# EAGLE board LC Meter (EAGLE 9.6.2)
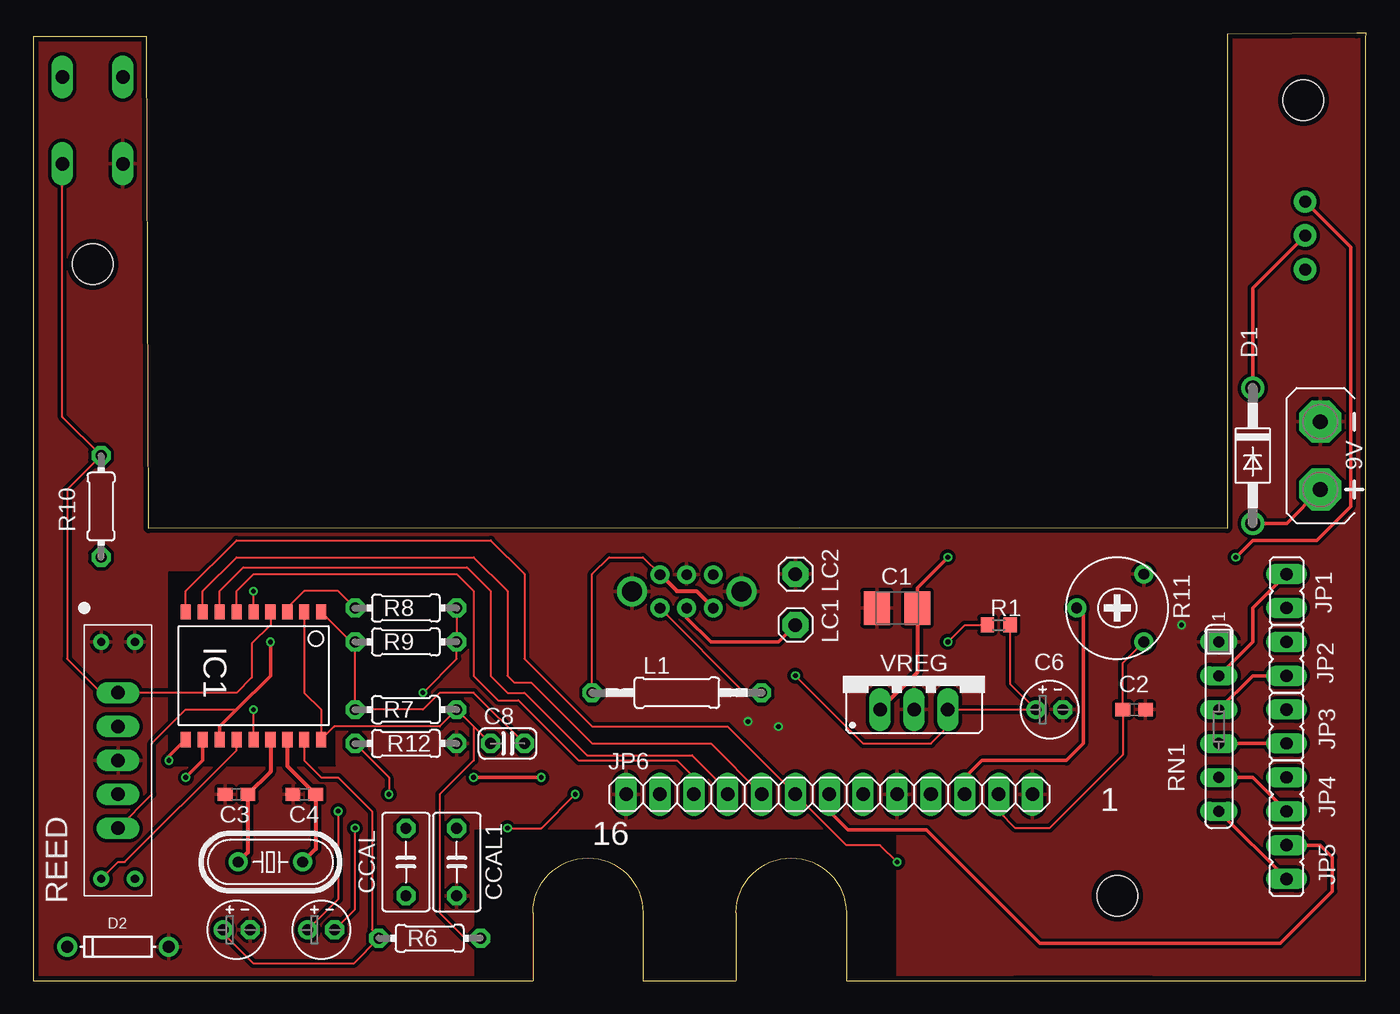
[diagram p0: board, top side]
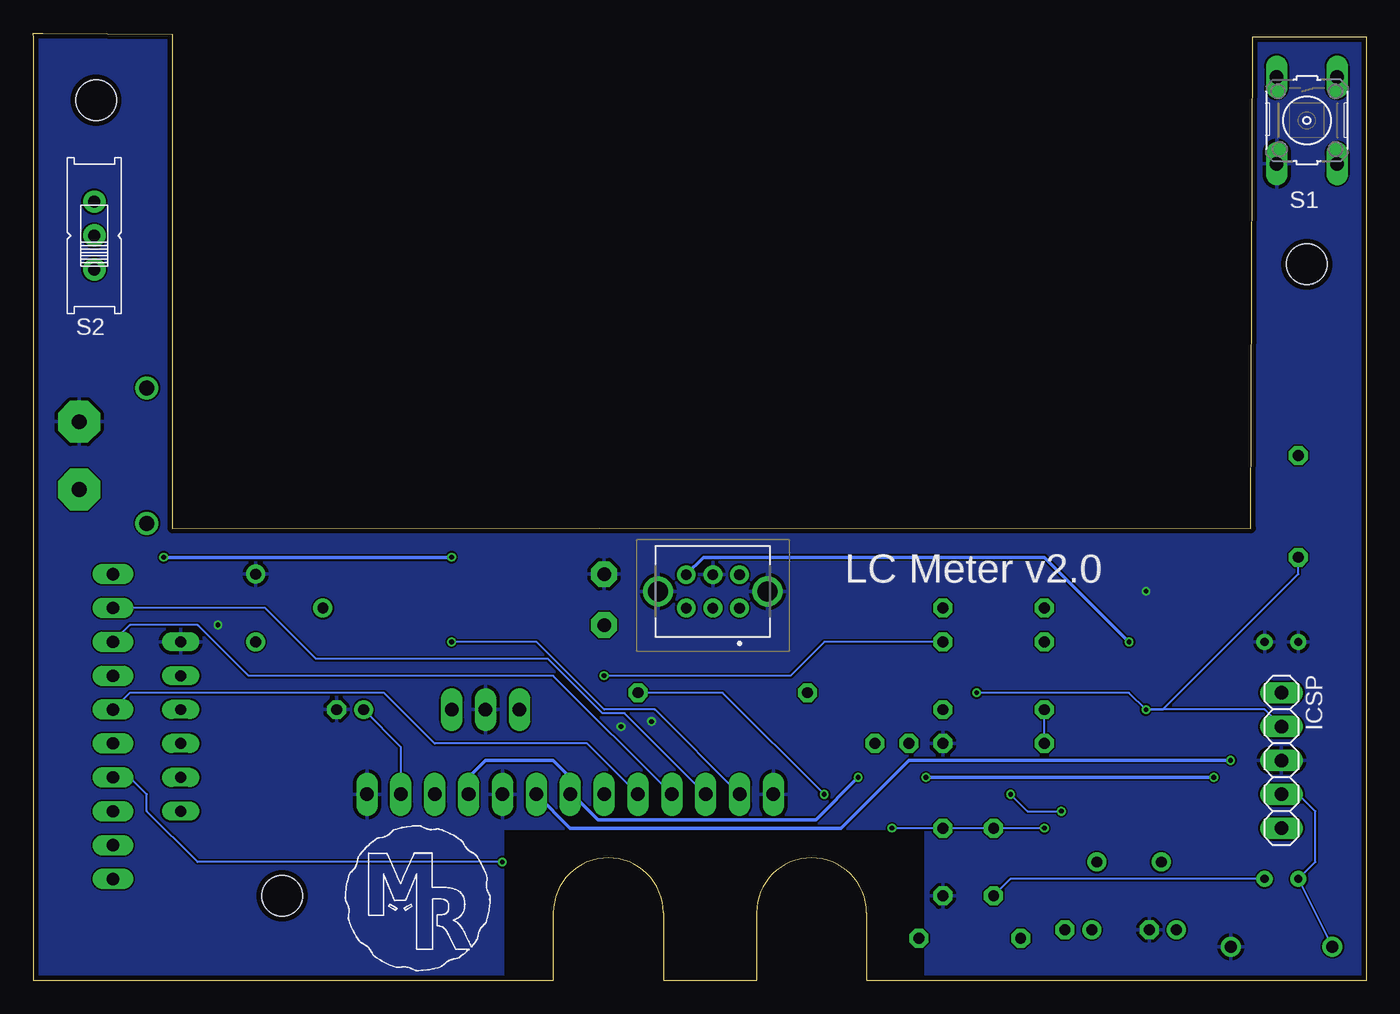
[diagram p1: board, bottom side, seen from below]

Size 99.95 x 71.04 mm. Coordinates in mm from the lower left corner, seen from the top.
Outline: 73.66,0 60.96,0 60.96,5.08 arc180 52.7,5.08 52.7,0 45.72,0 45.72,5.08 arc180 37.46,5.08 37.46,0 0,0 0,70.79 8.51,70.79 8.64,33.91 57.48,33.96 89.54,33.91 89.54,70.99 99.24,71.04 99.95,71.04 99.95,70.99 99.93,70.79 99.93,0 83.82,0
Outline: 73.66,0 74.3,0
Outline: 82.55,0 83.82,0
Outline: 73.66,0 83.82,0
Copper layers (1*16): Top 0.035mm / dielectric 1.5mm / Bottom 0.035mm
Design rules "JLPCB": minimum track width 5mil, minimum drill 0.2mm, track to track 5mil, track to pad 6mil, pad to pad 5mil, via to via 10mil, smd to smd 5mil, copper to edge 15mil, drill to drill 13mil, minimum pad ring 12mil, minimum via ring 6mil, stop-mask expansion 4mil, vias tented up to drill 0mil, thermal gap 10mil
Holes 3.05 mm at 4.45,53.72 95.25,66.04 81.28,6.35

## Footprints (pad centres in the part's own frame; a part is rotated, then mirrored left to right if it is on the bottom)
B/3528-21R = smd 1.95 x 2.5: + 1.525,0; - -1.525,0
C0603 = smd 1.1 x 1: 1 -0.85,0; 2 0.85,0
E2-4 = drill 0.813 pad 1.27: + -1.016,0 | drill 0.813 pad 1.27 octagon: - 1.016,0
C025-024X044 = drill 0.813 octagon: 1 -1.27,0; 2 1.27,0
C050-035X075 = drill 0.813 octagon: 1 -2.54,0; 2 2.54,0
DO41-10 = drill 1.118: A 5.08,0; C -5.08,0
DO-1N4148 = drill 0.9: A -3.81,0; C 3.81,0
AB9V = drill 1.118 pad 3.15 octagon: + 0,2.54; - 0,-2.54
SO-18W = smd 0.762 x 1.143: 1 -5.08,-4.788; 2 -3.81,-4.788; 3 -2.54,-4.788; 4 -1.27,-4.788; 5 0,-4.788; 6 1.27,-4.788; 7 2.54,-4.788; 8 3.81,-4.788; 9 5.08,-4.788; 10 5.08,4.788; 11 3.81,4.788; 12 2.54,4.788; 13 1.27,4.788; 14 0,4.788; 15 -1.27,4.788; 16 -2.54,4.788; 17 -3.81,4.788; 18 -5.08,4.788
1X05 = drill 1.016 long: 1 -5.08,0; 2 -2.54,0; 3 0,0; 4 2.54,0; 5 5.08,0
JP1 = drill 0.914 long: 1 0,-1.27; 2 0,1.27
1X13 = drill 1.016 long: 1 -15.24,0; 2 -12.7,0; 3 -10.16,0; 4 -7.62,0; 5 -5.08,0; 6 -2.54,0; 7 0,0; 8 2.54,0; 9 5.08,0; 10 7.62,0; 11 10.16,0; 12 12.7,0; 13 15.24,0
0207/12 = drill 0.813 octagon: 1 -6.35,0; 2 6.35,0
1X01 = drill 1.016 pad 1.93 octagon: 1 0,0
HC49/S = drill 0.813: 1 -2.413,0; 2 2.413,0
R0603 = smd 1 x 1.1: 1 -0.85,0; 2 0.85,0
0204/7 = drill 0.813 octagon: 1 -3.81,0; 2 3.81,0
RTRIM3339P = drill 0.813: 1 -2.54,2; 2 0,-3.04; 3 2.54,2
COTO2204 = drill 0.6: 1 -8.89,-1.27; 4 8.89,-1.27; 5 8.89,1.27; 8 -8.89,1.27
SIL6 = drill 0.813 long: 1 -6.35,0; 2 -3.81,0; 3 -1.27,0; 4 1.27,0; 5 3.81,0; 6 6.35,0
B3F-10XX = drill 1.016 long: 1 -3.251,2.261; 2 3.251,2.261; 3 -3.251,-2.261; 4 3.251,-2.261
EG1218 = drill 0.9 pad 1.676: O -2.54,0; P 0,0; S 2.54,0
OS202011MS2QS1 = drill 0.8 pad 1.3: 1 0,0; 2 2,0; 3 4,0; 4 0,-2.5; 5 2,-2.5; 6 4,-2.5 | drill 1.5 pad 2.25: MH1 -2.1,-1.25; MH2 6.1,-1.25
78XXS = drill 1.016 long: GND 0,-2.54; IN -2.54,-2.54; OUT 2.54,-2.54

## Placement (x,y rotation side)
C1  22uF  [B/3528-21R]  64.77,27.94 0 top
C2  0.1uF  [C0603]  82.55,20.32 0 top
C3  [C0603]  15.24,13.97 180 top
C4  [C0603]  20.32,13.97 180 top
C5  10uF  [E2-4]  21.59,3.81 0 top
C6  10uF  [E2-4]  76.2,20.32 0 top
C7  10uF  [E2-4]  15.24,3.81 0 top
C8  10pF  [C025-024X044]  35.56,17.78 0 top
CCAL  [C050-035X075]  27.94,8.89 270 top
CCAL1  [C050-035X075]  31.75,8.89 270 top
D1  1N4004  [DO41-10]  91.44,39.37 270 top
D2  [DO-1N4148]  6.35,2.54 180 top
G1  AB9V  [AB9V]  96.52,39.37 180 top
IC1  PIC16F628SO  [SO-18W]  16.51,22.86 180 top
ICSP  [1X05]  6.35,16.51 270 bottom
JP1  [JP1]  93.98,29.21 0 top
JP2  [JP1]  93.98,24.13 180 top
JP3  [JP1]  93.98,19.05 180 top
JP4  [JP1]  93.98,13.97 180 top
JP5  [JP1]  93.98,8.89 180 top
JP6  [1X13]  59.69,13.97 0 top
L1  [0207/12]  48.26,21.59 0 top
LC1  [1X01]  57.15,26.67 0 top
LC2  [1X01]  57.15,30.48 0 top
Q1  [HC49/S]  17.78,8.89 0 top
R1  1k  [R0603]  72.39,26.67 0 top
R6  47k  [0204/7]  29.72,3.17 180 top
R7  100k  [0204/7]  27.94,20.32 180 top
R8  4.7k  [0204/7]  27.94,27.94 180 top
R9  100k  [0204/7]  27.94,25.4 180 top
R10  4.7k  [0204/7]  5.08,35.56 90 top
R11  [RTRIM3339P]  81.28,27.94 270 top
R12  100k  [0204/7]  27.94,17.78 180 top
REED  REEDRELAY  [COTO2204]  6.35,16.51 270 top
RN1  [SIL6]  88.9,19.05 270 top
S1  [B3F-10XX]  4.45,64.52 270 bottom
S2  [EG1218]  95.38,55.88 90 bottom
S3  OS202011MS2QS1  [OS202011MS2QS1]  46.99,27.94 180 bottom
VREG  7805  [78XXS]  66.04,22.86 0 top

## Library data of the parts
C1 D2 LC1 LC2 S2 = adafruit
C2-C8 CCAL CCAL1 = rcl; SPICEPREFIX: C
D1 = diode
G1 = battery
IC1 = microchip; MF: MICROCHIP; MPN: PIC16F628-20I/SO; OC_FARNELL: 9760415; OC_NEWARK: 23C4986
ICSP JP6 = pinhead
JP1-JP5 = jumper
L1 = rcl; SPICEPREFIX: L
Q1 = adafruit; OC_FARNELL: 1667008; OC_NEWARK: unknown
R1 R6-R10 R12 = rcl; SPICEPREFIX: R
R11 = Custom Parts; SPICEMODEL: X; SPICEPREFIXL: POT
REED = Custom Parts
RN1 = resistor-sil; OC_FARNELL: unknown; OC_NEWARK: unknown
S1 = switch-omron; MPN: B3F-1000; OC_FARNELL: 176432; OC_NEWARK: 36M3542
S3 = OS202011MS2QS1; ARROW_PART_NUMBER: OS202011MS2QS1; ARROW_PRICE-STOCK: https://www.arrow.com/en/products/os202011ms2qs1/ck; DESCRIPTION: Switch Slide ON ON DPDT Top Slide 0.1A 12VDC 10000Cycles PC Pins Bracket Mount/Through Hole Bulk; HEIGHT: 8.7mm; MANUFACTURER_NAME: C & K COMPONENTS; MANUFACTURER_PART_NUMBER: OS202011MS2QS1; MOUSER_PART_NUMBER: 611-OS202011MS2QS1; MOUSER_PRICE-STOCK: https://www.mouser.co.uk/ProductDetail/CK/OS202011MS2QS1/?qs=86ySKn7Oc5UsfQ5%2FN%252BBOEA%3D%3D
VREG = v-reg

## Nets
5V: C2.1 C6.+ IC1.14 ICSP.2 JP6.12 R1.2 R8.1 R9.1 R10.1 R11.3 VREG.OUT
CLKIN: C4.1 IC1.16 Q1.2
CLKOUT: C3.1 IC1.15 Q1.1
GND: C1.- C2.2 C3.2 C4.2 C6.- C7.- CCAL1.2 D2.A G1.- IC1.5 ICSP.3 JP6.1 JP6.9 JP6.13 LC2.1 R11.1 R12.1 REED.1 REED.8 RN1.1 S1.4 S3.5 S3.MH1 S3.MH2 VREG.GND
N$1: JP5.2 RN1.6
N$2: CCAL.2 REED.5
N$3: C1.+ S2.S VREG.IN
N$4: D1.C S2.P
N$5: D1.A G1.+
N$7: C5.- CCAL1.1 CCAL.1 L1.2 S3.1
N$8: JP4.2 RN1.5
N$12: JP3.2 RN1.4
N$13: JP2.2 RN1.3
N$14: JP1.2 RN1.2
N$15: LC1.1 S3.2
N$22: L1.1 S3.3 S3.4
N$23: JP6.11 R11.2
N$31: JP6.2 R1.1
RA0: C7.+ IC1.17 R6.2
RA2: C5.+ C8.2 IC1.1 R7.2 R9.2 R12.2
RA3: C8.1 IC1.2 IC1.18 R6.1 R7.1
RA4: IC1.3 R8.2
RB0: IC1.6 JP1.1 JP6.3
RB1: IC1.7 JP2.1 JP6.4
RB2: IC1.8 JP3.1 JP6.5
RB3: IC1.9 JP4.1 JP6.6
RB4: IC1.10 JP6.8
RB5: IC1.11 JP5.1 JP6.7 JP6.10
RB6: IC1.12 ICSP.5 S3.6
RB7: D2.C IC1.13 ICSP.4 REED.4
RST: IC1.4 ICSP.1 R10.2 S1.2

## Tracks (layer width: path | path; a pad name or v marks a point on that pad's centre or on a via)
5V  (via drill 0.35)
  Top 0.152: R8.1 R9.1 31.75,24.13 v29.21,21.59 | IC1.14 v16.51,20.32 | v57.15,22.86 62.23,17.78 67.31,17.78 68.58,19.05 VREG.OUT C6.+ 73.24,22.26 R1.2 | JP6.12 72.39,12.7 73.66,11.43 76.2,11.43 81.7,16.93 C2.1 81.7,23.82 R11.3
  Bottom 0.152: v16.51,20.32 17.78,21.59 v29.21,21.59 | v16.51,20.32 15.24,20.32 5.08,30.48 R10.1 | ICSP.2 7.62,20.32 v16.51,20.32 | R9.1 40.64,25.4 43.18,22.86 v57.15,22.86 | C6.+ 72.39,17.53 JP6.12
CLKIN
  Top 0.305: IC1.16 19.05,16.09 C4.1 21.17,9.87 Q1.2
CLKOUT
  Top 0.305: IC1.15 17.78,15.66 C3.1 16.09,9.61 Q1.1
GND  (via drill 0.35)
  Top 0.152: IC1.5 v16.51,29.21
  other vias: 53.59,19.43 55.88,19.05 86.11,26.67
  pour Top (isolate 0.254): 0,71.12 0,0 33.02,0 33.02,11.43 64.77,11.43 64.77,0 100.33,0 100.33,71.12 88.9,71.12 88.9,34.29 8.89,34.29 8.89,71.12
  pour Bottom: -1.27,71.12 -1.27,0 0,-1.27 33.02,-1.27 33.02,11.43 64.77,11.43 64.77,-1.27 100.33,-1.27 101.6,0 101.6,71.12 100.33,72.39 87.63,72.39 87.63,34.29 11.43,34.29 8.89,36.83 8.89,72.39 0,72.39
  cutout Top: 10.16,30.61 10.16,16.13 22.61,16.13 22.61,30.61
N$1
  Top 0.254: RN1.6 JP5.2
N$2
  Bottom 0.152: REED.5 26.67,7.62 CCAL.2
N$3  (via drill 0.35)
  Top 0.254: S2.S 98.79,55.01 98.79,35.56 96.25,33.02 91.44,33.02 v90.17,31.75 | v68.58,31.75 66.3,29.46 C1.+
  Top 0.305: C1.+ 66.3,23.12 VREG.IN
  Bottom 0.254: v90.17,31.75 v68.58,31.75
N$4
  Top 0.254: D1.C 91.44,51.94 S2.P
N$5
  Top 0.254: G1.+ 93.98,34.29 D1.A
N$7  (via drill 0.35)
  Top 0.152: C5.- 24.13,5.33 v24.13,11.43 | S3.1 53.34,21.59 L1.2 | v35.56,11.43 38.1,11.43 v40.64,13.97
  Bottom 0.152: v24.13,11.43 CCAL.1 CCAL1.1 v35.56,11.43 | v40.64,13.97 48.26,21.59 L1.2
N$8
  Top 0.254: RN1.5 91.44,15.24 JP4.2
N$12
  Top 0.254: RN1.4 JP3.2
N$13
  Top 0.254: RN1.3 91.44,22.86 JP2.2
N$14
  Top 0.254: RN1.2 91.44,25.4 91.44,27.94 JP1.2
N$15
  Top 0.254: LC1.1 55.88,25.4 50.8,25.4 48.99,27.21 S3.2
N$22
  Top 0.152: L1.1 41.91,30.48 43.18,31.75 45.72,31.75 47.03,30.44
  Top 0.305: S3.4 47.03,30.44 48.26,29.21 49.72,29.21 S3.3
N$23
  Top 0.254: R11.2 78.74,27.44 78.74,17.78 77.47,16.51 71.12,16.51 69.85,15.24 JP6.11
N$31  (via drill 0.35)
  Top 0.152: v68.58,25.4 69.85,26.67 R1.1
  Bottom 0.152: JP6.2 53.34,20.32 57.15,20.32 62.23,25.4 v68.58,25.4
RA0
  Top 0.152: IC1.17 20.32,16.51 21.59,15.24 22.86,15.24 25.4,12.7 25.4,3.81 26.03,3.17 R6.2 24,1.27 16.51,1.27 14.22,3.56 C7.+
RA2  (via drill 0.35)
  Top 0.152: IC1.1 23.84,25.4 R9.2 R7.2 29.21,20.32 30.48,21.59 33.02,21.59 C8.2 | R12.2 26.67,15.24 v26.67,13.97 | v22.86,12.7 22.86,6.1 C5.+
  Bottom 0.152: R12.2 R7.2 | v26.67,13.97 25.4,12.7 v22.86,12.7
RA3
  Top 0.152: IC1.2 20.32,21.59 21.59,20.32 IC1.18 22.57,19.05 30.48,19.05 R7.1 | R7.1 33.02,19.05 33.02,16.51 30.48,13.97 30.48,5.08 32.38,3.17 R6.1 | C8.1 R7.1
RA4
  Top 0.152: R8.2 22.86,29.21 20.32,29.21 19.05,27.94 IC1.3
RB0
  Top 0.152: IC1.6 15.24,29.21 16.51,30.48 31.75,30.48 33.02,29.21 33.02,22.86 34.85,21.03 36.38,21.03 40.9,16.51 48.26,16.51 49.53,15.24 JP6.3
  Bottom 0.152: JP6.3 55.6,20.04 57.27,20.04 61.35,24.13 78.74,24.13 82.55,27.94 JP1.1
RB1
  Top 0.152: IC1.7 13.97,29.21 15.75,30.99 32.51,30.99 34.29,29.21 34.29,22.86 35.56,21.59 36.83,21.59 41.53,16.89 49.4,16.89 52.07,14.22 JP6.4
  Bottom 0.152: JP6.4 60.96,22.86 83.82,22.86 87.63,26.67 92.71,26.67 JP2.1
RB2
  Top 0.152: IC1.8 12.7,29.21 15.24,31.75 33.02,31.75 35.56,29.21 35.56,22.86 36.07,22.35 37.34,22.35 41.91,17.78 50.8,17.78 JP6.5
  Bottom 0.152: JP6.5 58.42,17.78 69.85,17.78 73.66,21.59 92.71,21.59 JP3.1
RB3  (via drill 0.35)
  Top 0.152: IC1.9 11.43,29.21 15.24,33.02 34.29,33.02 36.83,30.48 36.83,24.13 41.91,19.05 52.07,19.05 JP6.6 60.96,10.16 63.5,10.16 v64.77,8.89
  Bottom 0.152: v64.77,8.89 87.63,8.89 91.44,12.7 91.44,13.97 92.71,15.24 JP4.1
RB4  (via drill 0.35)
  Top 0.254: IC1.10 10.16,16.8 v10.16,16.51
  Bottom 0.254: v10.16,16.51 34.29,16.51 39.37,11.43 59.69,11.43 JP6.8
RB5  (via drill 0.35)
  Top 0.254: IC1.11 12.7,16.51 v11.43,15.24 | v33.02,15.24 v38.1,15.24 | JP6.7 59.69,12.7 61.09,11.3 66.98,11.3 75.49,2.79 93.51,2.79 97.43,6.71 97.43,9.25 96.52,10.16 JP5.1
  Bottom 0.254: v11.43,15.24 v33.02,15.24 | v38.1,15.24 41.27,12.06 57.6,12.06 59.51,13.97 JP6.7 59.69,15.24 60.96,16.51 66.04,16.51 67.31,15.24 JP6.10
RB6  (via drill 0.35)
  Top 0.152: ICSP.5 8.89,13.97 8.89,17.78 11.43,20.32 15.24,20.32
  Top 0.254: v17.78,25.4 17.78,22.86 15.24,20.32 13.97,19.05 IC1.12
  Bottom 0.254: v17.78,25.4 24.13,31.75 49.68,31.75 S3.6
RB7
  Top 0.152: REED.4 6.35,8.89 6.86,8.89 15.24,17.27 IC1.13
  Bottom 0.152: D2.C REED.4 3.81,8.89 3.81,12.7 5.08,13.97 ICSP.4
RST
  Top 0.152: IC1.4 17.78,26.67 16.38,25.27 16.38,22.73 15.24,21.59 ICSP.1 5.08,21.59 2.54,24.13 2.54,36.83 R10.2 2.18,42.27 S1.2

## Text on the board
tNames: 1 | 16
bNames: LC Meter v2.0